# EAGLE board Panelized (EAGLE 7.2.0)
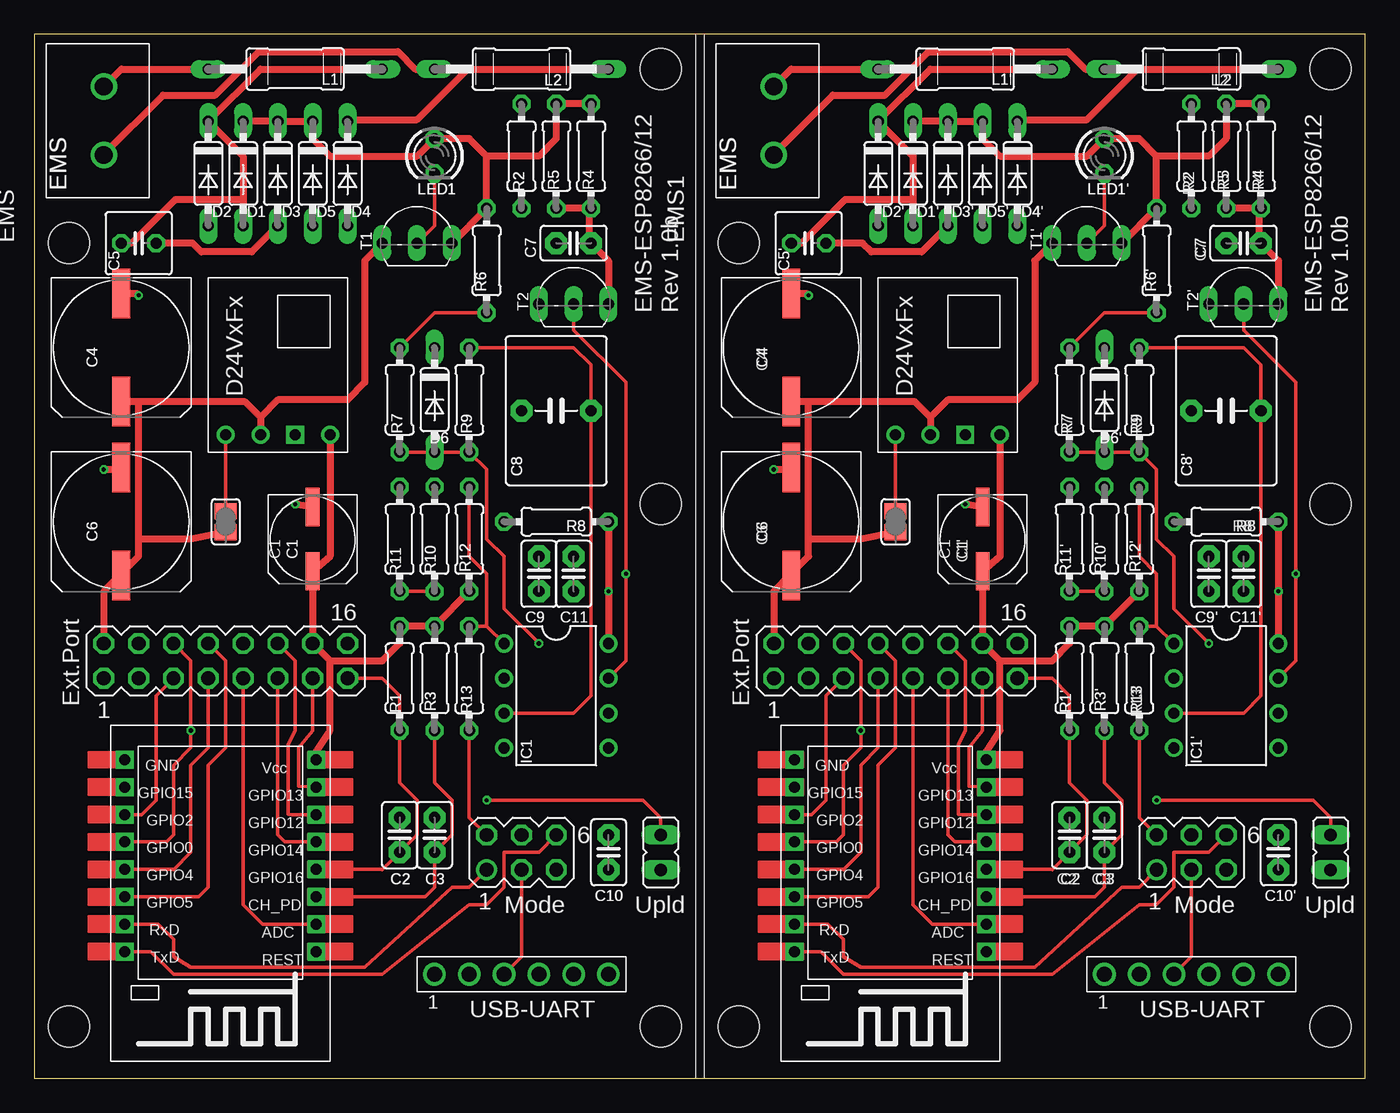
[diagram p0: board, top side]
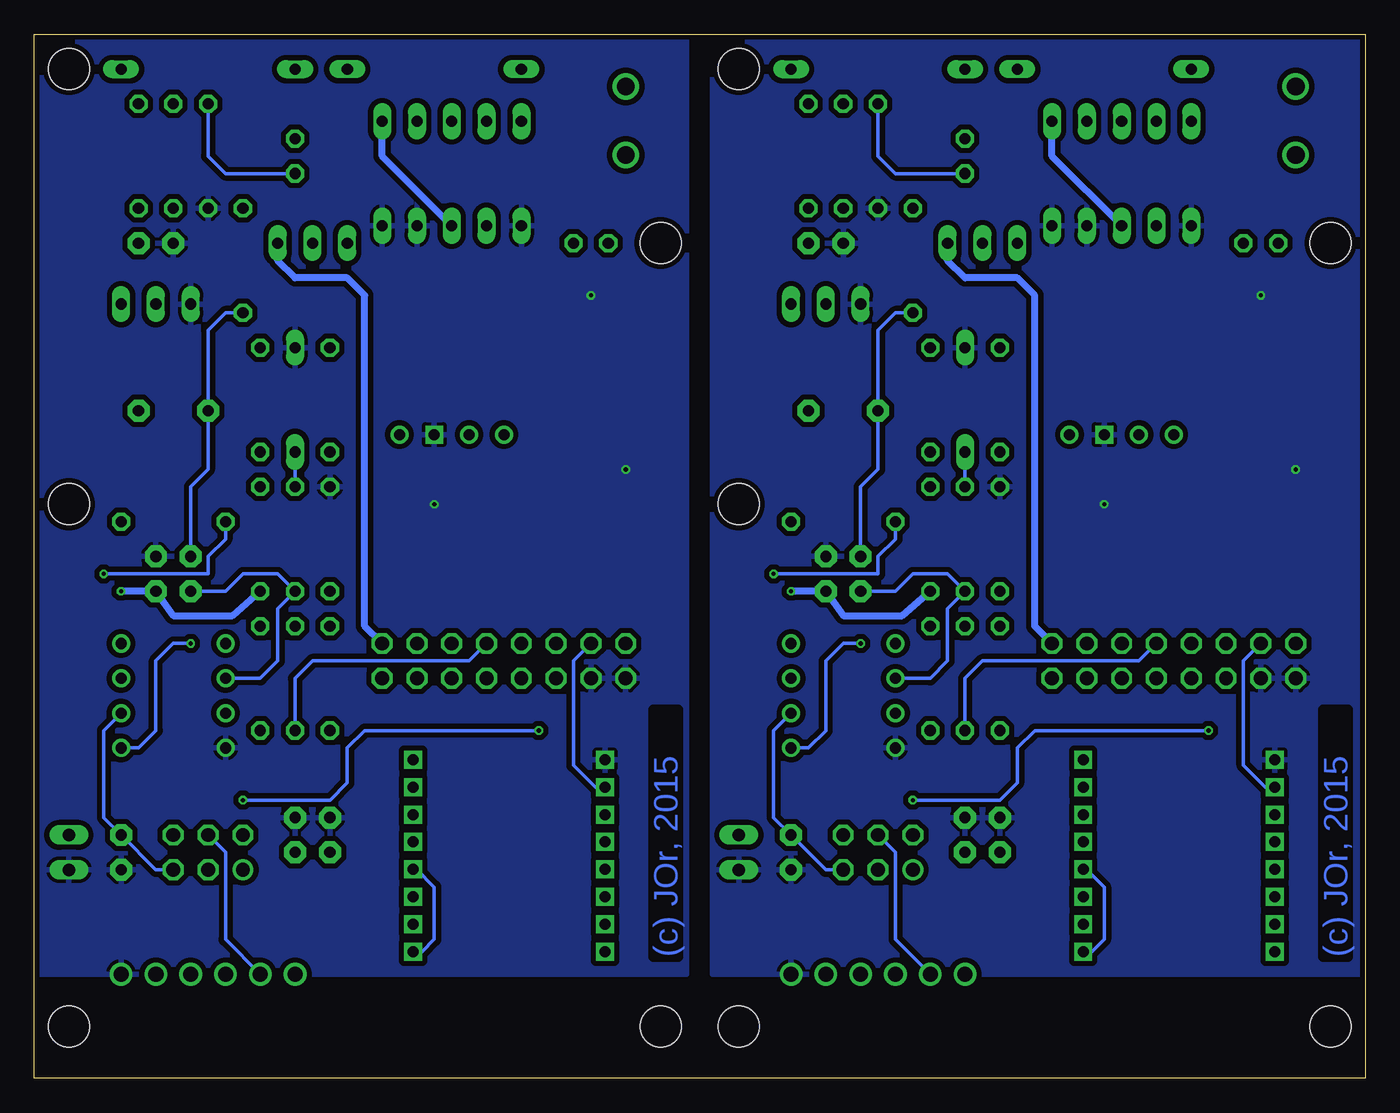
[diagram p1: board, bottom side, seen from below]

Size 97.14 x 76.17 mm. Coordinates in mm from the lower left corner, seen from the top.
Outline: 0,76.17 0,0 97.14,0 97.14,76.17 0,76.17
Copper layers (1*16): Top 0.035mm / dielectric 1.5mm / Bottom 0.035mm
Design rules "dirt_cheap_dirty_boards.v1": minimum track width 5mil, minimum drill 12mil, track to track 5mil, track to pad 5mil, pad to pad 5mil, via to via 5mil, smd to smd 0mil, copper to edge 10mil, drill to drill 10mil, minimum pad ring 10mil, minimum via ring 6mil, stop-mask expansion 2mil, vias tented up to drill 25mil, thermal gap 10mil
Net classes: 0 default: width 0.254 mm, drill 0.2 mm, clearance 0.254 mm; 1 pwr: width 0.508 mm, drill 0.2 mm, clearance 0.205 mm to class 0, clearance 0.254 mm; 2 signal: width 0.254 mm, drill 0.2 mm, clearance 0.205 mm to class 0, clearance 0.205 mm to class 1, clearance 0.205 mm
Holes 3 mm at 45.72,73.63 45.72,3.78 2.54,3.78 45.72,41.88 2.54,60.93 94.61,73.63 94.61,3.78 51.44,3.78 94.61,41.88 51.44,60.93

## Footprints (pad centres in the part's own frame; a part is rotated, then mirrored left to right if it is on the bottom)
UD-6,3X5,8_NICHICON = smd 2.8 x 1: + 2.35,0; - -2.35,0
C2.5-2 = drill 0.813 pad 1.6 octagon: 1 -1.27,0; 2 1.27,0
UD-10X10_NICHICON = smd 3.6 x 1.3: + 3.925,0; - -3.95,0
C025-050X050 = drill 0.813 octagon: 1 -1.27,0; 2 1.27,0
C5B11 = drill 0.813 pad 1.6 octagon: 1 1.27,5.56; 2 6.35,5.56
DO35-7 = drill 0.813 long: A 3.81,0; C -3.81,0
691102710002 = drill 1.3: 1 -5,0; 2 0,0
ESP-12 = drill 0.8 square: ADC 10,1; CH_PD 12,1; GND 22,15; GPIO0 16,15; GPIO2 18,15; GPIO4 14,15; GPIO5 12,15; GPIO12 18,1; GPIO13 20,1; GPIO14 16,1; GPIO15 20,15; GPIO16 14,1; REST 8,1; RXD 10,15; TXD 8,15; VCC 22,1
MA08-2 = drill 1.016 octagon: 1 -8.89,-1.27; 2 -8.89,1.27; 3 -6.35,-1.27; 4 -6.35,1.27; 5 -3.81,-1.27; 6 -3.81,1.27; 7 -1.27,-1.27; 8 -1.27,1.27; 9 1.27,-1.27; 10 1.27,1.27; 11 3.81,-1.27; 12 3.81,1.27; 13 6.35,-1.27; 14 6.35,1.27; 15 8.89,-1.27; 16 8.89,1.27
DIL08 = drill 0.813 pad 1.27: 1 -3.81,-3.81; 2 -1.27,-3.81; 3 1.27,-3.81; 4 3.81,-3.81; 5 3.81,3.81; 6 1.27,3.81; 7 -1.27,3.81; 8 -3.81,3.81
MICC12 = drill 0.813 long: 1 -6.35,0; 2 6.35,0
LED3MM = drill 0.813 octagon: A -1.27,0; K 1.27,0
D24VXFX = drill 0.8: /SHDN 11.43,1.27; VIN 11.43,3.81; VOUT 11.43,8.89 | drill 0.8 square: GND 11.43,6.35
61300611121 = drill 1.1: 1 -6.35,0; 2 -3.81,0; 3 -1.27,0; 4 1.27,0; 5 3.81,0; 6 6.35,0
0204/7 = drill 0.813 octagon: 1 -3.81,0; 2 3.81,0
SJ = smd 1.168 x 1.6: 1 -0.762,0; 2 0.762,0
MA03-2 = drill 1.016: 1 -2.54,-1.27 | drill 1.016 octagon: 2 -2.54,1.27; 3 0,-1.27; 4 0,1.27; 5 2.54,-1.27; 6 2.54,1.27
TO92-EBC = drill 0.813 long: B 0,-1.27; C 2.54,-1.27; E -2.54,-1.27
JP1 = drill 0.914 long: 1 0,-1.27; 2 0,1.27

## Placement (x,y rotation side)
C1  220u  [UD-6,3X5,8_NICHICON]  20.32,39.34 270 top
C1'  220u  [UD-6,3X5,8_NICHICON]  69.22,39.34 270 top
C2  100p  [C2.5-2]  26.67,17.75 90 top
C2'  100p  [C2.5-2]  75.56,17.75 90 top
C3  1n  [C2.5-2]  29.21,17.75 90 top
C3'  1n  [C2.5-2]  78.11,17.75 90 top
C4  820u  [UD-10X10_NICHICON]  6.35,53.31 270 top
C4'  820u  [UD-10X10_NICHICON]  55.24,53.31 270 top
C5  68p  [C025-050X050]  7.62,60.93 0 top
C5'  68p  [C025-050X050]  56.52,60.93 0 top
C6  820u  [UD-10X10_NICHICON]  6.35,40.61 270 top
C6'  820u  [UD-10X10_NICHICON]  55.24,40.61 270 top
C7  1.5n  [C2.5-2]  39.37,60.93 180 top
C7'  1.5n  [C2.5-2]  88.27,60.93 180 top
C8  10u  [C5B11]  34.29,43.15 0 top
C8'  10u  [C5B11]  83.19,43.15 0 top
C9  1n  [C2.5-2]  36.83,36.8 270 top
C9'  1n  [C2.5-2]  85.72,36.8 270 top
C10  10n  [C2.5-2]  41.91,16.48 270 top
C10'  10n  [C2.5-2]  90.81,16.48 270 top
C11  100n  [C2.5-2]  39.37,36.8 270 top
C11'  100n  [C2.5-2]  88.27,36.8 270 top
D1  BAT46  [DO35-7]  15.24,66.01 270 top
D1'  BAT46  [DO35-7]  64.14,66.01 270 top
D2  BAT46  [DO35-7]  12.7,66.01 270 top
D2'  BAT46  [DO35-7]  61.59,66.01 270 top
D3  BAT46  [DO35-7]  17.78,66.01 270 top
D3'  BAT46  [DO35-7]  66.67,66.01 270 top
D4  BAT46  [DO35-7]  22.86,66.01 270 top
D4'  BAT46  [DO35-7]  71.75,66.01 270 top
D5  BAT46  [DO35-7]  20.32,66.01 270 top
D5'  BAT46  [DO35-7]  69.22,66.01 270 top
D6  1N4148  [DO35-7]  29.21,49.5 270 top
D6'  1N4148  [DO35-7]  78.11,49.5 270 top
EMS  691102710002  [691102710002]  5.08,72.36 90 top
EMS1  691102710002  [691102710002]  53.98,72.36 90 top
ESP1  ESP-12ESP-12  [ESP-12]  21.59,1.24 90 top
ESP2  ESP-12ESP-12  [ESP-12]  70.48,1.24 90 top
EXT.PORT  Ext  [MA08-2]  13.97,30.45 0 top
EXT.PORT1  Ext  [MA08-2]  62.87,30.45 0 top
IC1  LM393N  [DIL08]  38.1,27.91 270 top
IC1'  LM393N  [DIL08]  87,27.91 270 top
L1  4.7uH  [MICC12]  19.05,73.63 0 top
L1'  4.7uH  [MICC12]  67.94,73.63 0 top
L2  4.7uH  [MICC12]  35.56,73.63 180 top
L2'  4.7uH  [MICC12]  84.45,73.63 180 top
LED1  3mm  [LED3MM]  29.21,67.28 270 top
LED1'  3mm  [LED3MM]  78.11,67.28 270 top
MOD1  D24V3F3  [D24VXFX]  12.7,58.39 270 top
MOD2  D24V3F3  [D24VXFX]  61.59,58.39 270 top
PROGRAM  61300611121  [61300611121]  35.56,7.59 0 top
PROGRAM1  61300611121  [61300611121]  84.45,7.59 0 top
R1  4k7  [0204/7]  26.67,29.18 90 top
R1'  4k7  [0204/7]  75.56,29.18 90 top
R2  10K  [0204/7]  35.56,67.28 270 top
R2'  10K  [0204/7]  84.45,67.28 270 top
R3  4k7  [0204/7]  29.21,29.18 90 top
R3'  4k7  [0204/7]  78.11,29.18 90 top
R4  470R  [0204/7]  40.64,67.28 270 top
R4'  470R  [0204/7]  89.53,67.28 270 top
R5  470R  [0204/7]  38.1,67.28 270 top
R5'  470R  [0204/7]  87,67.28 270 top
R6  10K  [0204/7]  33.02,59.66 90 top
R6'  10K  [0204/7]  81.92,59.66 90 top
R7  360R  [0204/7]  26.67,49.5 270 top
R7'  360R  [0204/7]  75.56,49.5 270 top
R8  4K7  [0204/7]  38.1,40.61 180 top
R8'  4K7  [0204/7]  87,40.61 180 top
R9  47K  [0204/7]  31.75,49.5 270 top
R9'  47K  [0204/7]  80.64,49.5 270 top
R10  10K  [0204/7]  29.21,39.34 90 top
R10'  10K  [0204/7]  78.11,39.34 90 top
R11  100K  [0204/7]  26.67,39.34 90 top
R11'  100K  [0204/7]  75.56,39.34 90 top
R12  4K7  [0204/7]  31.75,39.34 90 top
R12'  4K7  [0204/7]  80.64,39.34 90 top
R13  100  [0204/7]  31.75,29.18 270 top
R13'  100  [0204/7]  80.64,29.18 270 top
SJ1  n.u.  [SJ]  13.97,40.61 270 top
SJ2  n.u.  [SJ]  62.87,40.61 270 top
SV1  Mode  [MA03-2]  35.56,16.48 0 top
SV2  Mode  [MA03-2]  84.45,16.48 0 top
T1  BC547B  [TO92-EBC]  27.94,62.2 0 top
T1'  BC547B  [TO92-EBC]  76.83,62.2 0 top
T2  BC547B  [TO92-EBC]  39.37,57.76 0 top
T2'  BC547B  [TO92-EBC]  88.27,57.76 0 top
UPLD  Upload  [JP1]  45.72,16.48 0 top
UPLD1  Upload  [JP1]  94.61,16.48 0 top

## Library data of the parts
C1 C1' = rcl; CONRAD: VF 220/6,3 P-D
C2 C2' C7 C7' C10 C10' C11 C11' = capacitor-wima
C3 C3' C9 C9' = capacitor-wima; CONRAD: 453005-62
C4 C4' C6 C6' = rcl; CONRAD: VF 820/16 P-G
C5 C5' = resistor; CONRAD: 457221-62
C8 C8' = capacitor-wima; CONRAD: 450662-62
D1 D1' D2 D2' D3 D3' D4 D4' D5 D5' = diode; CONRAD: 153087-62
D6 D6' = diode; CONRAD: 162280-62
EMS EMS1 = EagleLibrary_Wuerth_Elektronik_eiCan_Terminal_Blocks_Connectors_v6_20150113
ESP1 ESP2 = ESP8266-ESP12
EXT.PORT EXT.PORT1 SV1 SV2 = con-lstb; OC_FARNELL: unknown; OC_NEWARK: unknown
IC1 IC1' = linear
L1 L1' L2 L2' = inductors; CONRAD: 440391-62
LED1 LED1' = led
MOD1 MOD2 = buckconv
PROGRAM PROGRAM1 = EagleLibrary_Wuerth_Elektronik_eiCan_Board_to_Board_Connectors_v6_20150113
R1 R1' R2 R2' R3 R3' R4 R4' R5 R5' R6 R6' R7 R7' R8 R8' R9 R9' R10 R10' R11 R11' R12 R12' R13 R13' = resistor
SJ1 SJ2 UPLD UPLD1 = jumper
T1 T1' T2 T2' = transistor

## Nets
+3V1 [pwr]: C1'.+ C11'.2 ESP2.VCC EXT.PORT1.14 IC1'.8 MOD2.VOUT R1'.2 R3'.2 R8'.1 R12'.1
+3V3 [pwr]: C1.+ C11.2 ESP1.VCC EXT.PORT.14 IC1.8 MOD1.VOUT R1.2 R3.2 R8.1 R12.1
ADC [signal]: ESP1.ADC EXT.PORT.9
ADC1 [signal]: ESP2.ADC EXT.PORT1.9
CH_PD [signal]: C3.1 ESP1.CH_PD EXT.PORT.10 R3.1
CH_PD1 [signal]: C3'.1 ESP2.CH_PD EXT.PORT1.10 R3'.1
EMS_RX [signal]: C10.1 IC1.6 SV1.5
EMS_RX1 [signal]: C10'.1 IC1'.6 SV2.5
EMS_TX [signal]: R13.2 SV1.2
EMS_TX1 [signal]: R13'.2 SV2.2
GND [pwr]: C1.- C2.2 C3.2 C4.- C6.- C7.2 C10.2 C11.1 D2.A D4.A D5.A D6.C ESP1.GND EXT.PORT.1 EXT.PORT.3 IC1.4 MOD1.GND PROGRAM.6 R2.2 R11.2 T2.E UPLD.1
GND1 [pwr]: C1'.- C2'.2 C3'.2 C4'.- C6'.- C7'.2 C10'.2 C11'.1 D2'.A D4'.A D5'.A D6'.C ESP2.GND EXT.PORT1.1 EXT.PORT1.3 IC1'.4 MOD2.GND PROGRAM1.6 R2'.2 R11'.2 T2'.E UPLD1.1
GPIO0 [signal]: ESP1.GPIO0 EXT.PORT.6 UPLD.2
GPIO1 [signal]: ESP2.GPIO2 EXT.PORT1.5
GPIO2 [signal]: ESP1.GPIO2 EXT.PORT.5
GPIO3 [signal]: ESP2.GPIO4 EXT.PORT1.7
GPIO4 [signal]: ESP1.GPIO4 EXT.PORT.7
GPIO5: ESP1.GPIO5 EXT.PORT.8
GPIO6 [signal]: ESP2.GPIO13 EXT.PORT1.13
GPIO7 [signal]: ESP2.GPIO12 EXT.PORT1.12
GPIO8 [signal]: ESP2.GPIO14 EXT.PORT1.11
GPIO9 [signal]: ESP2.GPIO0 EXT.PORT1.6 UPLD1.2
GPIO10: ESP2.GPIO5 EXT.PORT1.8
GPIO11: ESP2.GPIO15 EXT.PORT1.4
GPIO12 [signal]: ESP1.GPIO12 EXT.PORT.12
GPIO13 [signal]: ESP1.GPIO13 EXT.PORT.13
GPIO14 [signal]: ESP1.GPIO14 EXT.PORT.11
GPIO15: ESP1.GPIO15 EXT.PORT.4
N$1 [pwr]: C5.1 D1.A D2.C L1.2
N$2 [pwr]: C5.2 D3.A D4.C L2.1
N$3: MOD1./SHDN SJ1.1
N$4 [pwr]: EMS.2 L1.1
N$5: IC1.1 R12.2 R13.1
N$6 [pwr]: C7.1 R4.2 R5.2 T2.C
N$7: C8.1 C9.1 R6.1 R7.1
N$8 [pwr]: EMS.1 L2.2
N$9: C8.2 IC1.3 R9.1
N$10 [pwr]: C5'.2 D3'.A D4'.C L2'.1
N$11: C8'.1 C9'.1 R6'.1 R7'.1
N$12: C9.2 IC1.2 R10.1 R11.1
N$13 [pwr]: C5'.1 D1'.A D2'.C L1'.2
N$14: C9'.2 IC1'.2 R10'.1 R11'.1
N$15: IC1.7 R8.2 T2.B
N$16: IC1'.1 R12'.2 R13'.1
N$17: LED1.K R2.1 T1.B
N$18: IC1'.7 R8'.2 T2'.B
N$19 [pwr]: C7'.1 R4'.2 R5'.2 T2'.C
N$20: C8'.2 IC1'.3 R9'.1
N$21: LED1'.K R2'.1 T1'.B
N$22 [pwr]: EMS1.1 L2'.2
N$23 [pwr]: EMS1.2 L1'.1
N$24: MOD2./SHDN SJ2.1
REST [signal]: C2.1 ESP1.GPIO16 ESP1.REST EXT.PORT.15 R1.1
REST1 [signal]: C2'.1 ESP2.GPIO16 ESP2.REST EXT.PORT1.15 R1'.1
RXD [signal]: PROGRAM.2 SV1.4
RXD1 [signal]: PROGRAM1.2 SV2.4
TXD [signal]: PROGRAM.3 SV1.3
TXD1 [signal]: PROGRAM1.3 SV2.3
UBUCK [pwr]: C4.+ C6.+ EXT.PORT.2 MOD1.VIN SJ1.2 T1.E
UBUCK1 [pwr]: C4'.+ C6'.+ EXT.PORT1.2 MOD2.VIN SJ2.2 T1'.E
UEMS [pwr]: D1.C D3.C D5.C EXT.PORT.16 LED1.A R4.1 R5.1 R6.2 T1.C
UEMS1 [pwr]: D1'.C D3'.C D5'.C EXT.PORT1.16 LED1'.A R4'.1 R5'.1 R6'.2 T1'.C
UREF: D6.A IC1.5 R7.2 R9.2 R10.2
UREF1: D6'.A IC1'.5 R7'.2 R9'.2 R10'.2
URXD [signal]: ESP1.RXD SV1.1
URXD1 [signal]: ESP2.RXD SV2.1
UTXD: ESP1.TXD SV1.6
UTXD1: ESP2.TXD SV2.6

## Tracks (layer width: path | path; a pad name or v marks a point on that pad's centre or on a via)
+3V1  (via drill 0.3)
  Top 0.508: ESP2.VCC 69.48,23.83 70.48,25.37 70.48,30.45 | 70.48,30.45 74.3,30.45 75.56,31.72 R1'.2 R3'.2 R12'.1 | R8'.1 v90.81,35.53 IC1'.8 | 70.48,30.45 EXT.PORT1.14 C1'.+ 70.48,38.07 MOD2.VOUT
  Bottom 0.508: R12'.1 82.68,33.76 87,33.76 C11'.2 v90.81,35.53
+3V3  (via drill 0.3)
  Top 0.508: ESP1.VCC 20.59,23.83 21.59,25.37 21.59,30.45 | 21.59,30.45 25.4,30.45 26.67,31.72 R1.2 R3.2 R12.1 | R8.1 v41.91,35.53 IC1.8 | 21.59,30.45 EXT.PORT.14 C1.+ 21.59,38.07 MOD1.VOUT
  Bottom 0.508: R12.1 33.78,33.76 38.1,33.76 C11.2 v41.91,35.53
ADC
  Top 0.254: ESP1.ADC 16.67,11.24 15.24,12.67 EXT.PORT.9
ADC1
  Top 0.254: ESP2.ADC 65.56,11.24 64.14,12.67 EXT.PORT1.9
CH_PD
  Top 0.254: ESP1.CH_PD 28.51,13.24 29.21,13.94 C3.1 30.48,17.75 30.48,20.29 29.21,21.56 R3.1
  Bottom 0.254: EXT.PORT.10 16.51,30.45 27.94,30.45 29.21,29.18 R3.1
CH_PD1
  Top 0.254: ESP2.CH_PD 77.41,13.24 78.11,13.94 C3'.1 79.38,17.75 79.38,20.29 78.11,21.56 R3'.1
  Bottom 0.254: EXT.PORT1.10 65.41,30.45 76.83,30.45 78.11,29.18 R3'.1
EMS_RX
  Bottom 0.254: IC1.6 43.18,25.37 43.18,19.02 C10.1 39.37,15.21 SV1.5
EMS_RX1
  Bottom 0.254: IC1'.6 92.08,25.37 92.08,19.02 C10'.1 88.27,15.21 SV2.5
EMS_TX
  Top 0.254: R13.2 31.75,19.02 SV1.2
EMS_TX1
  Top 0.254: R13'.2 80.64,19.02 SV2.2
GND  (via drill 0.3)
  Top 0.508: v7.62,57.12 7.49,57.25 6.35,57.25 C4.- | v5.08,44.42 6.49,44.42 C6.- | v19.05,41.88 19.24,41.88 C1.-
  pour Bottom (isolate 0.381): 47.62,76.17 47.62,7.59 0,7.59 0,76.17
GND1  (via drill 0.3)
  Top 0.508: v56.52,57.12 56.39,57.25 55.24,57.25 C4'.- | v53.98,44.42 55.38,44.42 C6'.- | v67.94,41.88 68.14,41.88 C1'.-
  pour Bottom (isolate 0.381): 97.16,76.17 97.16,7.59 49.53,7.59 49.53,76.17
GPIO0  (via drill 0.3)
  Top 0.254: ESP1.GPIO0 9.65,17.24 10.16,17.75 10.16,22.83 11.43,24.1 v11.43,25.37 11.43,30.45 EXT.PORT.6 | UPLD.2 45.72,19.02 44.45,20.29 v33.02,20.29
  Bottom 0.254: v11.43,25.37 24.13,25.37 25.4,24.1 25.4,21.56 26.67,20.29 v33.02,20.29
GPIO1
  Top 0.254: ESP2.GPIO2 56.73,19.24 57.78,20.29 57.78,27.91 EXT.PORT1.5
GPIO2
  Top 0.254: ESP1.GPIO2 7.84,19.24 8.89,20.29 8.89,27.91 EXT.PORT.5
GPIO3
  Top 0.254: ESP2.GPIO4 59.02,15.24 59.05,15.21 60.33,16.48 60.33,21.56 60.33,22.83 61.59,24.1 EXT.PORT1.7
GPIO4
  Top 0.254: ESP1.GPIO4 10.13,15.24 10.16,15.21 11.43,16.48 11.43,21.56 11.43,22.83 12.7,24.1 EXT.PORT.7
GPIO5
  Top 0.254: ESP1.GPIO5 12,13.24 12.7,13.94 12.7,22.83 13.97,24.1 13.97,30.45 EXT.PORT.8
GPIO6
  Top 0.254: ESP2.GPIO13 68.2,21.31 68.2,24.1 69.22,25.37 EXT.PORT1.13
GPIO7
  Top 0.254: ESP2.GPIO12 67.72,19.24 67.44,19.28 67.44,24.36 67.94,25.37 67.94,30.45 EXT.PORT1.12
GPIO8
  Top 0.254: ESP2.GPIO14 67.19,17.24 66.67,17.75 EXT.PORT1.11
GPIO9  (via drill 0.3)
  Top 0.254: ESP2.GPIO0 58.55,17.24 59.05,17.75 59.05,22.83 60.33,24.1 v60.33,25.37 60.33,30.45 EXT.PORT1.6 | UPLD1.2 94.61,19.02 93.34,20.29 v81.92,20.29
  Bottom 0.254: v60.33,25.37 73.03,25.37 74.3,24.1 74.3,21.56 75.56,20.29 v81.92,20.29
GPIO10
  Top 0.254: ESP2.GPIO5 60.9,13.24 61.59,13.94 61.59,22.83 62.87,24.1 62.87,30.45 EXT.PORT1.8
GPIO11
  Bottom 0.254: EXT.PORT1.4 57.78,30.45 57.78,22.83 56.2,21.24 ESP2.GPIO15
GPIO12
  Top 0.254: ESP1.GPIO12 18.83,19.24 18.54,19.28 18.54,24.36 19.05,25.37 19.05,30.45 EXT.PORT.12
GPIO13
  Top 0.254: ESP1.GPIO13 19.3,21.31 19.3,24.1 20.32,25.37 EXT.PORT.13
GPIO14
  Top 0.254: ESP1.GPIO14 18.29,17.24 17.78,17.75 EXT.PORT.11
GPIO15
  Bottom 0.254: EXT.PORT.4 8.89,30.45 8.89,22.83 7.3,21.24 ESP1.GPIO15
N$1
  Top 0.508: L1.2 16.51,73.63 D2.C 15.24,67.28 15.24,64.11 | 15.24,64.11 D1.A | C5.1 7.11,60.93 10.29,64.11 15.24,64.11
N$2
  Top 0.508: L2.1 31.62,73.63 27.94,69.95 22.99,69.95 D4.C | C5.2 11.56,60.93 12.19,60.3 15.88,60.3 D3.A
  Bottom 0.508: D4.C 22.86,67.28 D3.A
N$3
  Top 0.254: MOD1./SHDN SJ1.1
N$4
  Top 0.508: L1.1 6.35,73.63 EMS.2
N$5
  Top 0.254: IC1.1 33.02,32.99 | 33.02,32.99 R13.1 | R12.2 31.75,38.07 33.02,36.8 33.02,32.99
N$6
  Top 0.508: R5.2 R4.2 40.51,63.35 40.51,61.06 C7.1 41.91,59.66 T2.C
N$7
  Top 0.254: R6.1 29.21,55.85 R7.1
  Bottom 0.254: R6.1 34.29,55.85 35.56,54.58 C8.1 35.56,44.42 36.83,43.15 C9.1
N$8
  Top 0.508: L2.2 27.81,73.63 26.54,74.9 16.38,74.9 13.21,71.73 9.4,71.73 5.08,67.41 EMS.1
N$9
  Top 0.254: R9.1 39.37,53.31 40.64,52.04 C8.2 40.64,27.91 39.37,26.64 IC1.3
N$10
  Top 0.508: L2'.1 80.52,73.63 76.83,69.95 71.88,69.95 D4'.C | C5'.2 60.45,60.93 61.09,60.3 64.77,60.3 D3'.A
  Bottom 0.508: D4'.C 71.75,67.28 D3'.A
N$11
  Top 0.254: R6'.1 78.11,55.85 R7'.1
  Bottom 0.254: R6'.1 83.19,55.85 84.45,54.58 C8'.1 84.45,44.42 85.72,43.15 C9'.1
N$12
  Top 0.254: R11.1 R10.1
  Bottom 0.254: IC1.2 31.75,29.18 30.48,30.45 30.48,34.26 R10.1 30.48,36.8 33.02,36.8 34.29,35.53 C9.2
N$13
  Top 0.508: L1'.2 65.41,73.63 D2'.C 64.14,67.28 64.14,64.11 | 64.14,64.11 D1'.A | C5'.1 56.01,60.93 59.18,64.11 64.14,64.11
N$14
  Top 0.254: R11'.1 R10'.1
  Bottom 0.254: IC1'.2 80.64,29.18 79.38,30.45 79.38,34.26 R10'.1 79.38,36.8 81.92,36.8 83.19,35.53 C9'.2
N$15  (via drill 0.3)
  Top 0.254: T2.B 39.37,54.58 43.18,50.77 v43.18,36.8 43.18,30.45 IC1.7
  Bottom 0.254: R8.2 34.29,39.34 35.56,38.07 35.56,36.8 v43.18,36.8
N$16
  Top 0.254: IC1'.1 81.92,32.99 | 81.92,32.99 R13'.1 | R12'.2 80.64,38.07 81.92,36.8 81.92,32.99
N$17
  Top 0.254: LED1.K 29.21,62.2 T1.B
  Bottom 0.254: R2.1 35.56,67.28 34.29,66.01 LED1.K
N$18  (via drill 0.3)
  Top 0.254: T2'.B 88.27,54.58 92.08,50.77 v92.08,36.8 92.08,30.45 IC1'.7
  Bottom 0.254: R8'.2 83.19,39.34 84.45,38.07 84.45,36.8 v92.08,36.8
N$19
  Top 0.508: R5'.2 R4'.2 89.41,63.35 89.41,61.06 C7'.1 90.81,59.66 T2'.C
N$20
  Top 0.254: R9'.1 88.27,53.31 89.53,52.04 C8'.2 89.53,27.91 88.27,26.64 IC1'.3
N$21
  Top 0.254: LED1'.K 78.11,62.2 T1'.B
  Bottom 0.254: R2'.1 84.45,67.28 83.19,66.01 LED1'.K
N$22
  Top 0.508: L2'.2 76.71,73.63 75.44,74.9 65.28,74.9 62.1,71.73 58.29,71.73 53.98,67.41 EMS1.1
N$23
  Top 0.508: L1'.1 55.24,73.63 EMS1.2
N$24
  Top 0.254: MOD2./SHDN SJ2.1
REST
  Top 0.254: ESP1.GPIO16 25.37,15.24 25.4,15.21 C2.1 27.94,17.75 27.94,20.29 26.67,21.56 R1.1 26.67,27.91 25.4,29.18 EXT.PORT.15
  Bottom 0.254: ESP1.GPIO16 20.35,15.24 19.05,13.94 19.05,10.13 19.94,9.24 ESP1.REST
REST1
  Top 0.254: ESP2.GPIO16 74.27,15.24 74.3,15.21 C2'.1 76.83,17.75 76.83,20.29 75.56,21.56 R1'.1 75.56,27.91 74.3,29.18 EXT.PORT1.15
  Bottom 0.254: ESP2.GPIO16 69.25,15.24 67.94,13.94 67.94,10.13 68.83,9.24 ESP2.REST
RXD
  Bottom 0.254: SV1.4 34.29,16.48 34.29,10.13 PROGRAM.2
RXD1
  Bottom 0.254: SV2.4 83.19,16.48 83.19,10.13 PROGRAM1.2
TXD
  Top 0.254: SV1.3 35.56,8.86 PROGRAM.3
TXD1
  Top 0.254: SV2.3 84.45,8.86 PROGRAM1.3
UBUCK
  Top 0.508: EXT.PORT.2 5.08,35.53 6.24,36.69 C6.+ 6.35,36.8 7.62,38.07 7.62,39.34 | C4.+ 7.62,49.39 | 7.62,49.39 15.36,49.39 16.51,48.23 | 16.51,48.23 MOD1.VIN | 7.62,39.34 7.62,49.39 | T1.E 24.13,59.66 24.13,50.77 22.86,49.5 17.78,49.5 16.51,48.23 | SJ1.2 11.43,39.34 7.62,39.34
UBUCK1
  Top 0.508: EXT.PORT1.2 53.98,35.53 55.13,36.69 C6'.+ 55.24,36.8 56.52,38.07 56.52,39.34 | C4'.+ 56.52,49.39 | 56.52,49.39 64.25,49.39 65.41,48.23 | 65.41,48.23 MOD2.VIN | 56.52,39.34 56.52,49.39 | T1'.E 73.03,59.66 73.03,50.77 71.75,49.5 66.67,49.5 65.41,48.23 | SJ2.2 60.33,39.34 56.52,39.34
UEMS
  Top 0.508: R4.1 R5.1 38.1,68.55 36.83,67.28 33.02,67.28 | D1.C D3.C D5.C 20.32,68.55 21.59,67.28 27.94,67.28 LED1.A 31.75,68.55 33.02,67.28 | T1.C R6.2 33.02,67.28
  Bottom 0.508: EXT.PORT.16 24.13,32.99 24.13,57.12 25.4,58.39 29.21,58.39 30.48,59.66 T1.C
UEMS1
  Top 0.508: R4'.1 R5'.1 87,68.55 85.72,67.28 81.92,67.28 | D1'.C D3'.C D5'.C 69.22,68.55 70.48,67.28 76.83,67.28 LED1'.A 80.64,68.55 81.92,67.28 | T1'.C R6'.2 81.92,67.28
  Bottom 0.508: EXT.PORT1.16 73.03,32.99 73.03,57.12 74.3,58.39 78.11,58.39 79.38,59.66 T1'.C
UREF  (via drill 0.3)
  Top 0.254: R7.2 D6.A R9.2 33.02,44.42 33.02,39.34 34.29,38.07 34.29,34.26 v36.83,31.72
  Bottom 0.254: D6.A R10.2 | IC1.5 40.64,24.1 39.37,25.37 39.37,30.45 38.1,31.72 v36.83,31.72
UREF1  (via drill 0.3)
  Top 0.254: R7'.2 D6'.A R9'.2 81.92,44.42 81.92,39.34 83.19,38.07 83.19,34.26 v85.72,31.72
  Bottom 0.254: D6'.A R10'.2 | IC1'.5 89.53,24.1 88.27,25.37 88.27,30.45 87,31.72 v85.72,31.72
URXD
  Top 0.254: SV1.1 31.75,13.94 30.48,13.94 24.13,8.1 11.43,8.1 10.16,8.86 10.16,10.13 9.05,11.24 ESP1.RXD
URXD1
  Top 0.254: SV2.1 80.64,13.94 79.38,13.94 73.03,8.1 60.33,8.1 59.05,8.86 59.05,10.13 57.95,11.24 ESP2.RXD
UTXD
  Top 0.254: SV1.6 36.83,16.48 34.29,16.48 34.29,13.94 33.02,12.67 31.75,12.67 25.4,7.59 10.16,7.59 8.51,9.24 ESP1.TXD
UTXD1
  Top 0.254: SV2.6 85.72,16.48 83.19,16.48 83.19,13.94 81.92,12.67 80.64,12.67 74.3,7.59 59.05,7.59 57.41,9.24 ESP2.TXD

## Text on the board
Bottom: (c) JOr, 2015 | (c) JOr, 2015
tPlace: Ext.Port | Ext.Port | Mode | Upld | Mode | Upld | 1 | 1 | USB-UART | USB-UART
_tNames: L1 | L1 | L2 | L2 | L1 | L1 | L2 | L2 | R2 | R2 | R5 | R5 | R4 | R4 | R2 | R2 | R5 | R5 | R4 | R4 | EMS | EMS | LED1 | LED1 | EMS | EMS | LED1 | LED1 | D2 | D2 | D1 | D1 | D3 | D3 | D5 | D5 | D4 | D4 | D2 | D2 | D1 | D1 | D3 | D3 | D5 | D5 | D4 | D4 | C7 | C7 | C7 | C7 | T1 | T1 | T1 | T1 | C5 | C5 | C5 | C5 | R6 | R6 | R6 | R6 | T2 | T2 | EMS-ESP8266/12 / Rev 1.0b | T2 | T2 | EMS-ESP8266/12 / Rev 1.0b | C4 | C4 | C4 | C4 | R7 | R7 | R9 | R9 | R7 | R7 | R9 | R9 | D6 | D6 | D6 | D6 | C8 | C8 | C8 | C8 | C6 | C6 | R8 | R8 | C6 | C6 | R8 | R8 | C1 | C1 | C1 | C1 | R11 | R11 | R10 | R10 | R12 | R12 | R11 | R11 | R10 | R10 | R12 | R12 | C9 | C9 | C11 | C11 | C9 | C9 | C11 | C11 | R13 | R13 | R13 | R13 | R1 | R1 | R3 | R3 | R1 | R1 | R3 | R3 | IC1 | IC1 | IC1 | IC1 | C2 | C2 | C3 | C3 | C2 | C2 | C3 | C3 | C10 | C10 | C10 | C10